# Altium PCB GenRF_R01.PcbDoc
Units mil, origin at the board's own origin, x right, y up, seen from the top; angles counter-clockwise.
Board outline 2755.91 x 1771.65 mil, 2 copper layers (Top Layer, Bottom Layer); 51 components, 36 nets, 161 pads, 297 vias.
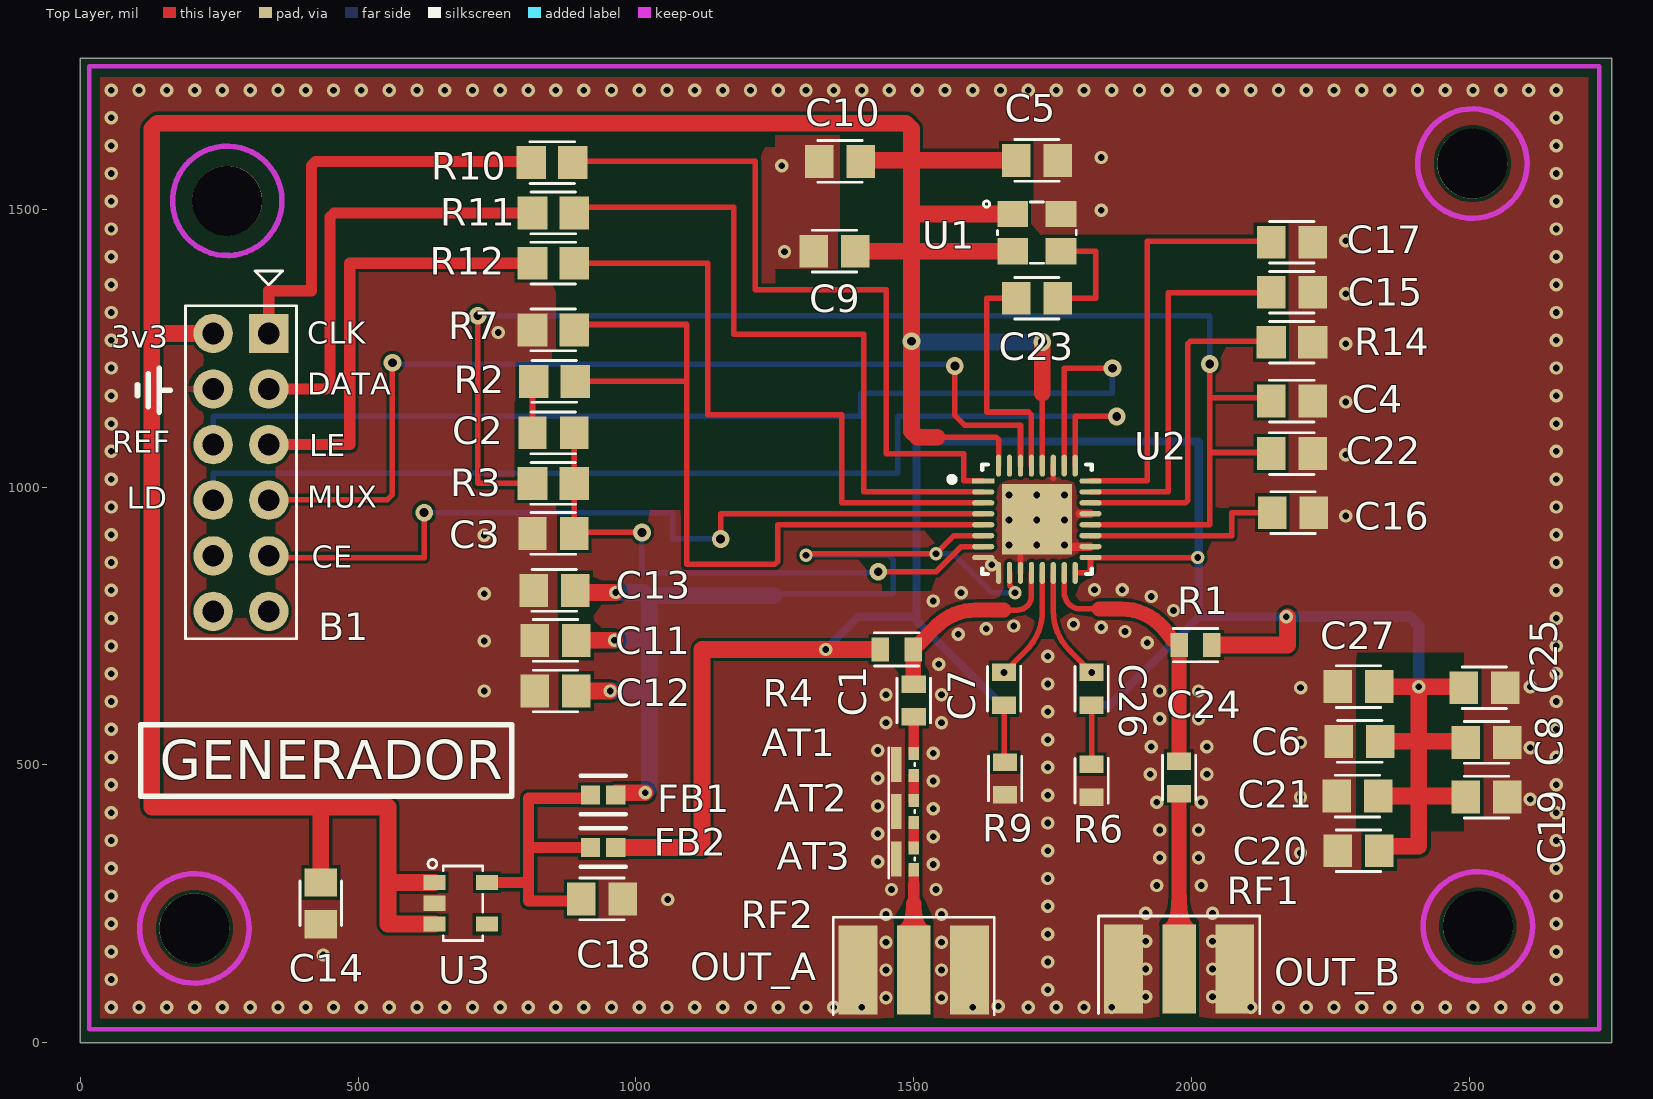
[diagram p0: Top Layer view]
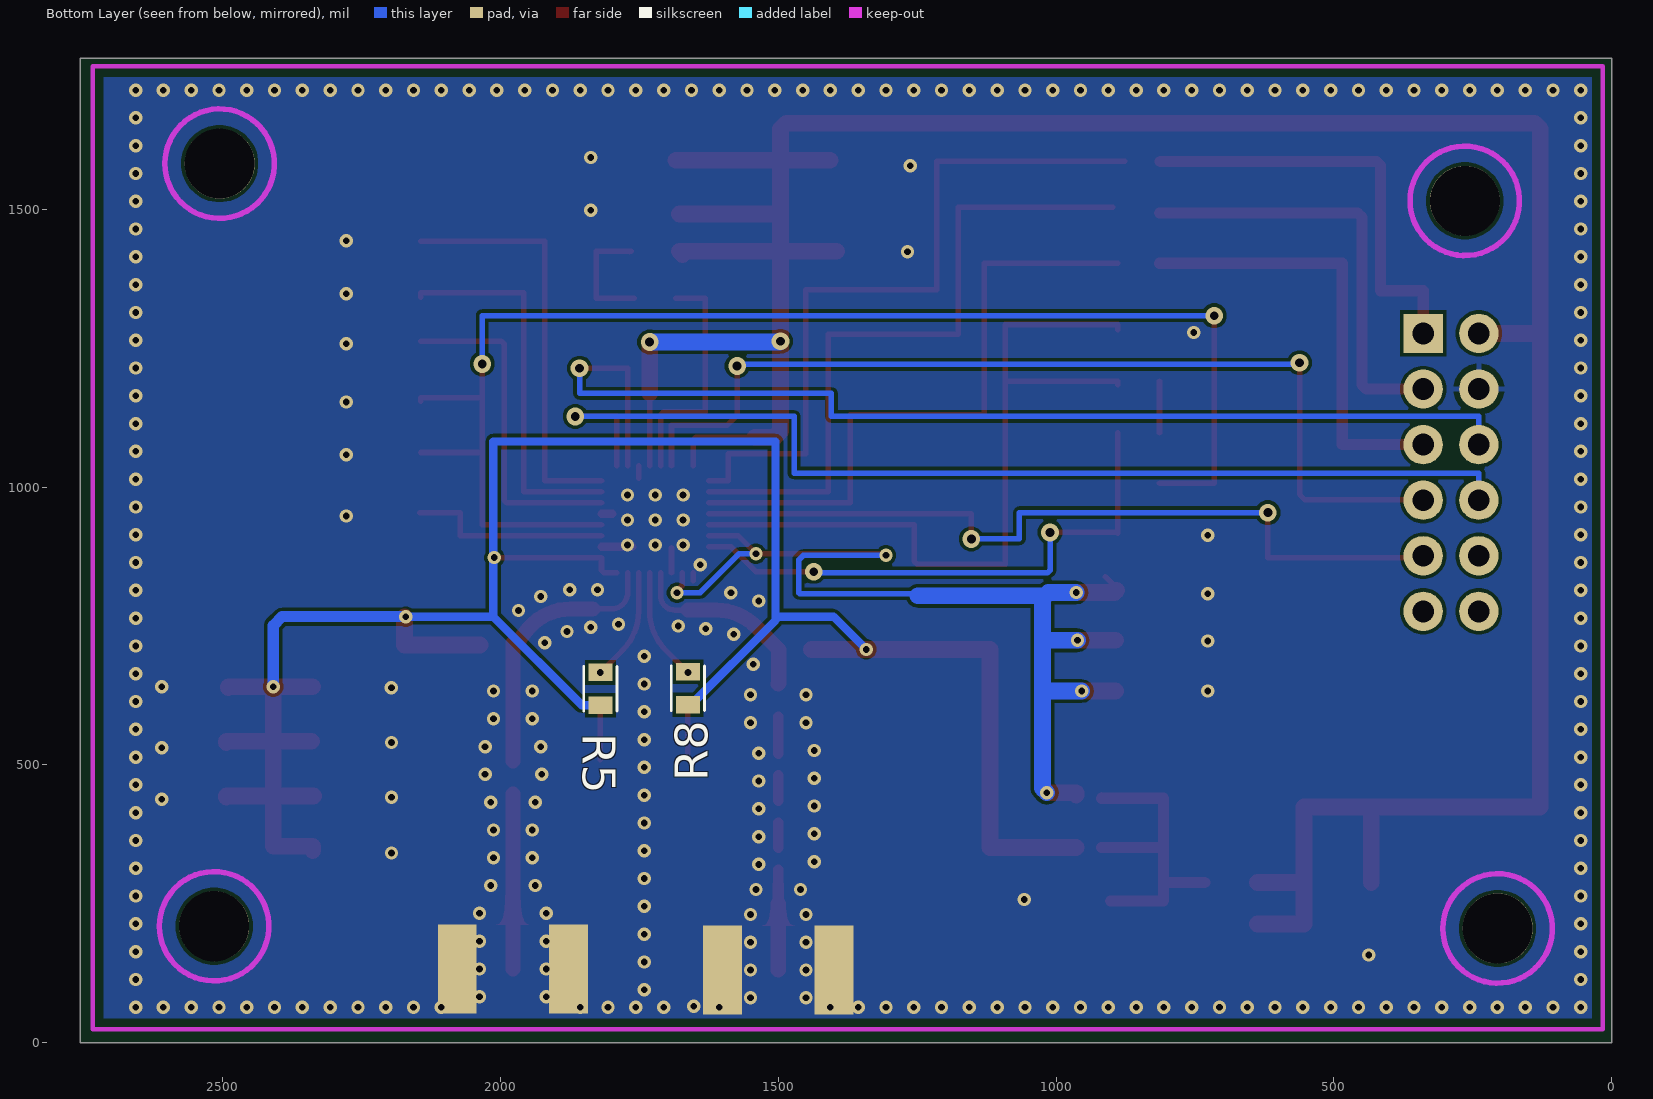
[diagram p1: Bottom Layer view, seen from below]
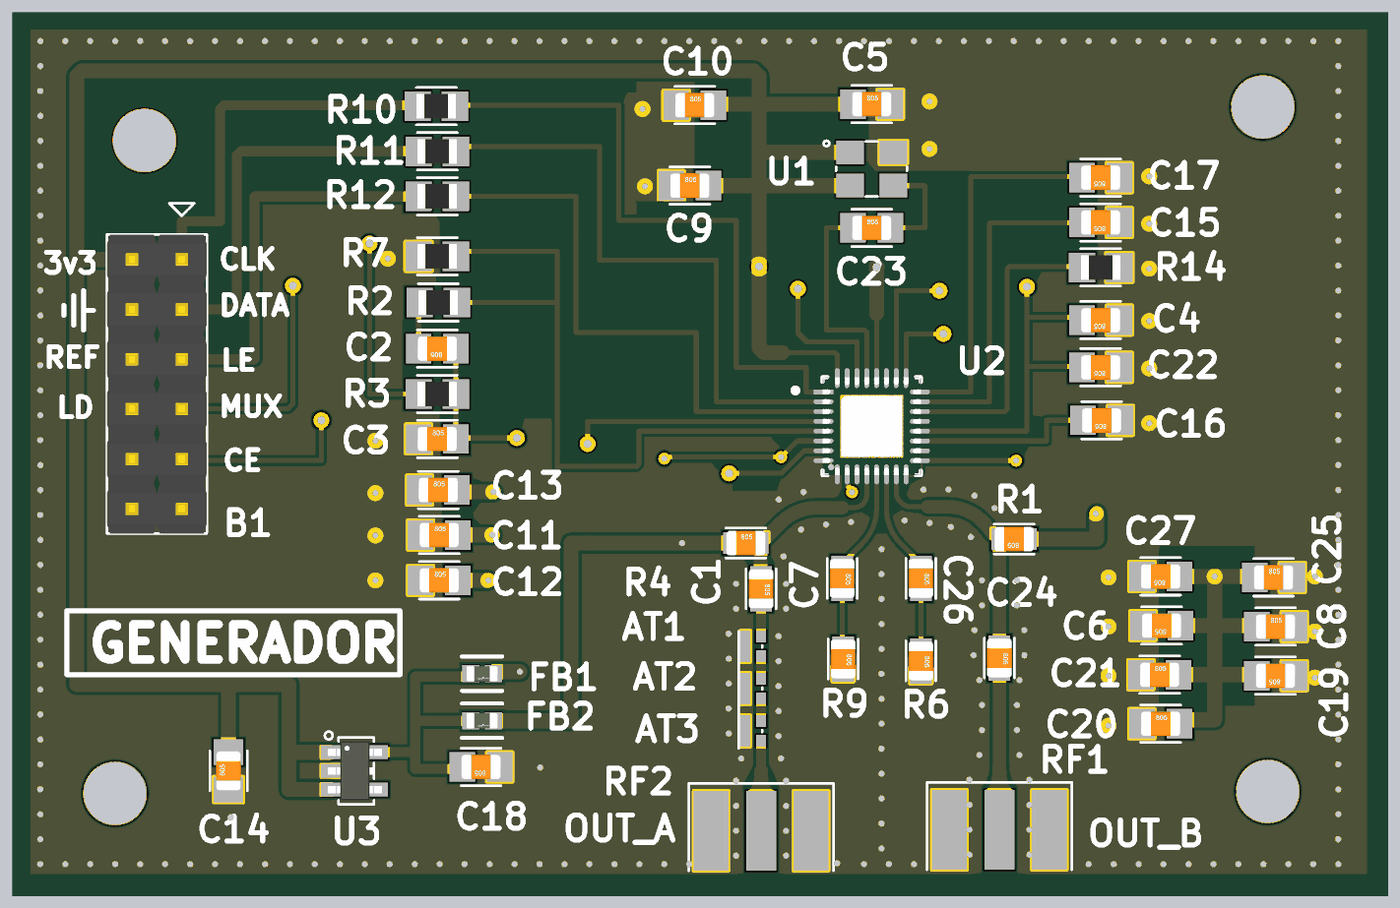
[diagram p2: 3D render of the assembled board from above, using the file's embedded part models]

## Layer stack, top to bottom
Top Solder: solder mask 0.4, Solder Resist, Dk 3.5
Top Layer: signal copper 1.4
Dielectric 1: dielectric 12.6, FR-4, Dk 4.8
Bottom Layer: signal copper 1.4
Bottom Solder: solder mask 0.4, Solder Resist, Dk 3.5

## Board outline
0,0 0,1771.65 2755.91,1771.65 2755.91,0

## Design rules (kind name [scope] priority, off if disabled: settings)
Clearance Clearance_1 [OnMid vs OnMid] p1: gap=6 ignorepadtopadclearanceinfootprint=FALSE sourcerule=39 cellrowname=All cellrowtype=0 cellcolname=All cellcoltype=0 innerlayers=TRUE
Clearance Clearance_2 [(ExistsOnLayer('Top Layer') Or ExistsOnLayer('Bottom Layer')) vs (ExistsOnLayer('Top Layer') Or ExistsOnLayer('Bottom Layer'))] p2: gap=6 ignorepadtopadclearanceinfootprint=FALSE sourcerule=39 cellrowname=All cellrowtype=0 cellcolname=All cellcoltype=0 outerlayers=TRUE
Clearance [All] p3: gap=10 ignorepadtopadclearanceinfootprint=FALSE ismatrix=TRUE
PolygonConnect [All] p1: thpad.connectstyle=Relief thpad.reliefconductorwidth=10 thpad.reliefentries=4 thpad.polygonreliefangle="90 Angle" thpad.airgapwidth=10 smdpad.connectstyle=Direct smdpad.reliefconductorwidth=10 smdpad.reliefentries=4 smdpad.polygonreliefangle="90 Angle" smdpad.airgapwidth=10 via.connectstyle=Direct via.reliefconductorwidth=10 via.reliefentries=4 via.polygonreliefangle="90 Angle" via.airgapwidth=10
RoutingVias RoutingViaStyle_1 [All] p1: holewidth=12 width=24 viastyle="Through Hole" minholewidth=10 minwidth=10 maxholewidth=50 maxwidth=50
RoutingVias [All] p2: holewidth=28 width=50 viastyle="Through Hole" minholewidth=28 minwidth=50 maxholewidth=28 maxwidth=50
SolderMaskExpansion [All] p1: expansion=4 istentingtop=FALSE
SupplyNets "Schematic Supply Nets" [InNet('GND')] p1: voltage=0.000
Width MaxMinWidth_1 [All] p1: maxlimit=100 minlimit=6 preferedwidth=10 minimp=50.000000 maximp=50.000000 favimp=50.000000
Width [All] p2: maxlimit=10 minlimit=10 preferedwidth=10
30 further rules are at their usual default settings.

## Components (designator, comment, footprint, x,y, rotation, side; value= is the part's Value field where it differs from the comment)
AT1 "Atenuador" "Attenuator 0603" 1499.84,520.35 r270 top
AT2 "Atenuador" "Attenuator 0603" 1499.84,435.67 r270 top
AT3 "Atenuador" "Attenuator 0603" 1499.84,350.67 r270 top
B1 "Tira de pines de 12" "Header_M_2x6_0.1\"" 339.49,1276.26 r270 top
C1 "Capacitor" C_0603 1499.84,615.98 r270 top value=100pF
C2 "Capacitor" C_0805 851.3,1097.52 r180 top value=100nF
C3 "Capacitor" C_0805 851.3,916.42 r0 top value=12nF
C4 "Capacitor" C_0805 2180.04,1154.61 r180 top value=680pF
C5 "Capacitor" C_0805 1721.38,1587.68 r0 top value=0.01uF
C6 "Capacitor" C_0805 2302.09,542.4 r180 top value=100pF
C7 "Capacitor" C_0603 1662.32,636.89 r270 top value=100pF
C8 "Capacitor" C_0805 2530.43,540.43 r0 top value=100pF
C9 "Capacitor" C_0805 1357.2,1424.29 r0 top value=100nF
C10 "Capacitor" C_0805 1367.05,1585.71 r0 top value=100nF
C11 "Capacitor" C_0805 855.24,724.05 r0 top value=100nF
C12 "Capacitor" C_0805 855.24,632.95 r0 top value=100nF
C13 "Capacitor" C_0805 853.27,814.06 r0 top value=100pF
C14 "Capacitor" C_0805 433.03,251.06 r90 top value=1uF
C15 "Capacitor" C_0805 2180.04,1350.37 r180 top value=1uF
C16 "Capacitor" C_0805 2182.01,953.82 r180 top value=1uF
C17 "Capacitor" C_0805 2180.04,1440.38 r180 top value=1uF
C18 "Capacitor" C_0805 938.94,258.94 r180 top value=1uF
C19 "Capacitor" C_0805 2530.43,442.01 r180 top value=100nF
C20 "Capacitor" C_0805 2300.12,345.55 r0 top value=100nF
C21 "Capacitor" C_0805 2298.15,443.98 r0 top value=100pF
C22 "Capacitor" C_0805 2180.04,1060.12 r180 top value=150pF
C23 "Capacitor" C_0805 1721.38,1339.65 r0 top value=10nF
C24 "Capacitor" C_0603 1977.28,477.44 r270 top value=100pF
C25 "Capacitor" C_0805 2526.5,638.86 r0 top value=100pF
C26 "Capacitor" C_0603 1819.8,636.89 r270 top value=100pF
C27 "Capacitor" C_0805 2300.12,640.83 r180 top value=100pF
FB1 "BLM18PG181SN1D" FB_0603 940.91,445.94 r0 top
FB2 "BLM18PG181SN1D" FB_0603 940.91,351.46 r0 top
R1 "Resistor" R_0603 2006.81,715.63 r180 top value=49R9
R2 "Resistor" R_0805 853.27,1190.04 r180 top value=30R
R3 "Resistor" R_0805 851.3,1006.43 r0 top value=240R
R4 "Resistor" R_0603 1469.41,707.77 r0 top value=49R9
R5 "Resistor" R_0603 1819.8,636.89 r270 bottom value=49R9
R6 "Resistor" R_0603 1819.8,471.54 r270 top value=49R9
R7 "Resistor" R_0805 851.3,1282.56 r180 top value=90R
R8 "Resistor" R_0603 1662.28,637.95 r90 bottom value=49R9
R9 "Resistor" R_0603 1664.29,475.47 r270 top value=49R9
R10 "Resistor" R_0805 849.33,1583.74 r0 top value=120R
R11 "Resistor" R_0805 851.3,1493.19 r0 top value=120R
R12 "Resistor" R_0805 851.3,1402.64 r0 top value=120R
R14 "Resistor" R_0805 2180.04,1260.36 r180 top value=5K1
RF1 "SMA_Connector" SMA_Connector 1977.28,132.95 r180 top
RF2 "SMA_Connector" SMA_Connector 1499.84,130.98 r180 top
U1 "7X-19.200MBA-T" XTAL 1721.38,1457.76 r0 top
U2 "MAX2871ETJ+" MAX2870ETJ+ 1721.38,941.96 r0 top
U3 "LP5907QMFX-3.3" TSOP 685,251.06 r90 top

## Footprints (in the part's own frame and the unit in brackets; to place one, negate y for a bottom-side part, rotate by r counter-clockwise, add the part's x,y. Pads: shape width x height; smd on the part's side, far side on the other; paste and mask are expansions set on the pad)
"Attenuator 0603" [mm]
  rect 0.6x0.5 smd: 1(0,0) 2(1,0)
  rect 1.6x0.5 smd: 3(0.5,-0.8)
  silkscreen extent 0.45,0.05 0.55,0.05
C_0603 [mm] "Chip Capacitor, 2-Leads,"
  rect 0.8x1.1 smd: 1(-0.75,0) 2(0.75,0)
  silkscreen extent -1.02,-0.76 1.02,0.76, body extent -1,-0.62 1,0.63, height 0.78
C_0805 [mm] "Chip Capacitor, 2-Leads, Body 2.00x1.25mm"
  rect 1.3x1.5 smd: 1(-0.95,0) 2(0.95,0)
  silkscreen extent -1.02,-0.95 1.02,0.95, body extent -1,-0.62 1,0.63, height 0.78
FB_0603 [mm]
  rect 0.88x0.86 smd paste+0 mask+0.05: 1(-0.576,0) 2(0.576,0)
  silkscreen extent -1.03,-0.87 1.03,0.87, body extent -1.13,-0.58 1.13,0.58, height 0.25
"Header_M_2x6_0.1\"" [mm] "Header Male 2 x 6 Vias Pitch 100mils"
  rect 1.8x1.8 hole 1: 1(0,0)
  round 1.8 hole 1: 2(0,-2.54) 3(2.54,0) 4(2.54,-2.54) 5(5.08,0) 6(5.08,-2.54) 7(7.62,0) 8(7.62,-2.54) 9(10.16,0) 10(10.16,-2.54) 11(12.7,0) 12(12.7,-2.54)
  silkscreen extent -2.86,-3.81 13.95,1.27, body extent -1.27,-3.81 13.97,1.27, height 5.59
MAX2870ETJ+ [mm]
  rect 1.01x0.242 smd paste+0 mask+0: 1(-2.451,1.75)
  rrect100% 1.01x0.242 smd paste+0 mask+0: 2(-2.451,1.25) 3(-2.451,0.75) 4(-2.451,0.25) 5(-2.451,-0.25) 6(-2.451,-0.75) 7(-2.451,-1.25) 8(-2.451,-1.75) 17(2.451,-1.75) 18(2.451,-1.25) 19(2.451,-0.75) 20(2.451,-0.25) 21(2.451,0.25) 22(2.451,0.75) 23(2.451,1.25) 24(2.451,1.75)
  rrect100% 0.242x1.01 smd paste+0 mask+0: 9(-1.75,-2.451) 10(-1.25,-2.451) 11(-0.75,-2.451) 12(-0.25,-2.451) 13(0.25,-2.451) 14(0.75,-2.451) 15(1.25,-2.451) 16(1.75,-2.451) 25(1.75,2.451) 26(1.25,2.451) 27(0.75,2.451) 28(0.25,2.451) 29(-0.25,2.451) 30(-0.75,2.451) 31(-1.25,2.451) 32(-1.75,2.451)
  rect 3.2x3.2 smd paste-1000 mask+0: 33(0,0)
  silkscreen extent -4.01,-2.5 2.5,2.5, body extent -3.46,-3.46 3.46,3.46, height 0.25
R_0603 [mm] "Chip Capacitor, 2-Leads,"
  rect 0.8x1.1 smd: 1(-0.75,0) 2(0.75,0)
  silkscreen extent -1.02,-0.76 1.02,0.76, body extent -1,-0.62 1,0.63, height 0.78
R_0805 [mm] "Chip Resistor, 2-Leads, Body 2.00x1.25mm, IPC Low Density"
  rect 1.35x1.5 smd: 1(-0.95,0) 2(0.95,0)
  silkscreen extent -1.02,-0.95 1.02,0.95, body extent -1,-0.62 1,0.62, height 0.6
SMA_Connector [mil] "SMA PCB Connector 1.6mm / PN: EMPCB.CSMAFSTJ.A"
  rect 60x160 smd: 1(0,0)
  rect 70x160 smd: 2(-100,0) 2(100,0)
  rect 70x160 smd far side: 2(-100,0) 2(100,0)
  silkscreen extent -145,-95 145,80, body extent -121,-60 121,80, height 10
TSOP [mm]
  rect 0.7x1 smd mask+0.06: 1(0.95,1.2) 2(0,1.2) 3(-0.95,1.2)
  rect 0.7x1 smd: 4(-0.95,-1.2) 5(0.95,-1.2)
  silkscreen extent -1.7,-1 2,1.5, body extent -1.5,-1.41 1.5,1.34, height 1.1
XTAL [mm] "XTAL OSC XO 19.2000MHZ CMOS SMD"
  rect 1.4x1.2 smd: 1(-1.1,0.85) 2(1.1,0.85) 3(1.1,-0.85) 4(-1.1,-0.85)
  silkscreen extent -2.44,-1.4 1.8,1.44

## Part data
B1: library part "Headpin 10"
FB1 FB2: library part "Ferrite Bead"
RF1 RF2: "Connector SMA"
U1: "XTAL OSC XO 19.2000MHZ CMOS SMD"
U3: "IC REG LINEAR 3.3V 250MA SOT23-5"
C1 C2 C3 C4 C5 C6 C7 C8 C9 C10 C11 C12 C13 C14 C15 C16 C17 C18 C19 C20 C21 C22 C23 C24 C25 C26 C27: SimulationGenericComponent=True
R1 R2 R3 R4 R5 R6 R7 R8 R9 R10 R11 R12 R14: SimulationGenericComponent=True, TC1=0, TC2=0

## Free pads (board coordinates)
  round 125.98 hole 125.98: 2(205.63,205.79) 2(264.68,1514.84) 2(2504.84,1581.77) 2(2514.68,209.72)

## Via types
v1: diameter 24, hole 12, Top Layer to Bottom Layer, tented both sides, 254 vias
v2: diameter 24, hole 12, Top Layer to Bottom Layer, 30 vias
v3: diameter 32, hole 16, Top Layer to Bottom Layer, 11 vias
v4: diameter 32, hole 16, Top Layer to Bottom Layer, tented both sides, 1 vias
v5: diameter 24.02, hole 12, Top Layer to Bottom Layer, 1 vias

## Nets (pads, with @x,y where several pads share a name; then routed paths per layer and width w, separated by ;. In a path a pad name is that pad's centre, name@x,y a point inside that pad or via, vN(x,y) a via of type N, cw(c..) or ccw(c..) an arc to the next point about the centre after c; other vN are vias at no path point)
3V3: B1.2 C5.1 C9.2 C10.2 C14.2 U1.1 U1.4 U2.28 U2.32 U3.1 U3.3 | length 5599.8
  Top Layer w10: U3.1@637.76,286.5 U3.1 ; 1542.24,1089.65 1647.79,1089.65 1652.48,1084.96 U2.32 ; U2.28 1731.22,1168.39
  Top Layer w30: B1.2 128.86,1276.26 ; C14.2 433.03,424.29 ; U3.3 554.06,213.66 554.06,288.46 ; U3.1 554.06,288.46 ; C9.2 1495.8,1424.29 ; C10.2@1406.42,1587.68 1495.8,1587.68 ; 1504.84,1587.68 C5.1 ; 1542.24,1089.65 1506.35,1089.65 1495.8,1100.19 1495.8,1424.29 ; U1.4@1672.17,1418.39 U1.4 1495.8,1424.29 ; U1.1 1495.8,1491.22 ; 1731.22,1168.39 v4(1731.22,1260.91) ; 128.86,1276.26 128.86,424.29 433.03,424.29 ; 128.86,1276.26 128.86,1644.06 139.4,1654.61 1485.26,1654.61 1495.8,1644.06 1495.8,1587.68 ; 433.03,424.29 554.06,424.29 554.06,288.46 ; 1495.8,1424.29 1495.8,1491.22 ; 1495.8,1491.22 1495.8,1587.68
  Bottom Layer w30: v3@1496.97,1260.91 v4(1731.22,1260.91)
  other v3: 1495.8,1262.24
CP_OUT: C2.1 C3.2 R3.2 U2.7 | length 1006.9
  Top Layer w10: C3.2 C3.2@888.7,918.39 ; C2.1 R3.2 C3.2@888.7,918.39 ; v3(1010.75,918.39) C3.2@888.7,918.39 ; v3(1435.94,847.52) 1540.05,847.52 1585.27,892.75 U2.7
  Bottom Layer w10: v3(1010.75,918.39) 1010.75,850.24 1015.43,845.55 1433.98,845.55 v3(1435.94,847.52)
GND: AT1.3 AT2.3 AT3.3 B1.4 C3.1 C4.1 C5.2 C6.2 C8.2 C9.1 C10.1 C11.1 C12.1 C13.1 C14.1 C15.1 C16.1 C17.1 C18.1 C19.1 C20.1 C21.1 C22.1 C25.2 C27.2 R6.2 R7.2 R9.2 R14.1 RF1.2 RF2.2 U1.2 U2.8 U2.9 U2.11 U2.18 U2.21 U2.27 U2.33 U3.2 | length 157.1
  Top Layer w10: U2.9@1652.48,831.15 U2.9 ; U2.11 U2.33@1691.85,890.83 ; 1750.91,1015.95 U2.27
  Top Layer w15: U2.33@1762.72,892.75 U2.18 ; U2.21@1798.17,951.8 U2.21
  other v1: 56.02,64.06 106.02,64.06 156.02,64.06 206.02,64.06 256.02,64.06 306.02,64.06 356.02,64.06 406.02,64.06 456.02,64.06 506.02,64.06 556.02,64.06 606.02,64.06 656.02,64.06 706.02,64.06 756.02,64.06 806.02,64.06 856.02,64.06 906.02,64.06 956.02,64.06 1006.02,64.06 1056.02,64.06 1106.02,64.06 1156.02,64.06 1206.02,64.06 1256.02,64.06 1306.02,64.06 1356.02,64.06 1406.02,64.06 1606.02,64.06 1706.02,64.06 1756.02,64.06 1806.02,64.06 1856.02,64.06 2106.02,64.06 2156.02,64.06 2206.02,64.06 2256.02,64.06 2306.02,64.06 2356.02,64.06 2406.02,64.06 2456.02,64.06 2506.02,64.06 2556.02,64.06 2606.02,64.06 2656.02,64.06 1651.81,65.98 1449.84,80.98 1549.84,80.98 1917.28,82.95 2037.28,82.95 1741.06,95.55 56.02,114.06 2656.02,114.06 1449.84,130.98 1549.84,130.98 1917.28,132.95 2037.28,132.95 1741.06,145.55 437.28,157.95 56.02,164.06 2656.02,164.06 1449.84,180.98 1549.84,180.98 1917.28,182.95 2037.28,182.95 1741.06,195.55 56.02,214.06 2656.02,214.06 1449.84,230.98 1549.84,230.98 1917.28,232.95 2037.28,232.95 1741.06,245.55 1057.28,257.95 56.02,264.06 2656.02,264.06 1459.84,275.98 1539.84,275.98 1937.28,282.95 2017.28,282.95 1741.06,295.55 56.02,314.06 2656.02,314.06 1534.84,320.98 1434.84,325.98 1942.28,332.95 2012.28,332.95 1741.06,345.55 56.02,364.06 2656.02,364.06 1534.84,370.98 1434.84,375.98 1942.28,382.95 2012.28,382.95 1741.06,395.55 56.02,414.06 2656.02,414.06 1534.84,420.98 1434.84,425.98 1937.28,432.95 2017.28,432.95 1741.06,445.55 56.02,464.06 2656.02,464.06 1534.84,470.98 1434.84,475.98 1925.32,482.95 2027.28,482.95 1741.06,495.55 56.02,514.06 2656.02,514.06 1534.84,520.98 1434.84,525.98 1927.28,532.95 2027.28,532.95 1741.06,545.55 56.02,564.06 2656.02,564.06 1449.84,575.98 1549.84,575.98 1942.28,582.95 2012.28,582.95 1741.06,595.55 56.02,614.06 2656.02,614.06 1449.84,625.98 1549.84,625.98 1942.28,632.95 2012.28,632.95 1741.06,645.55 56.02,664.06 2656.02,664.06 1544.84,680.98 1741.06,695.55 56.02,714.06 2656.02,714.06 1920,720 1580,735 1880,740 1630,745 1837.28,747.95 1680,750 1787.28,752.95 56.02,764.06 2656.02,764.06 1967.28,777.95 1535,795 1927.28,802.95 1585,810 56.02,814.06 2656.02,814.06 1825,815 1875,815 1640,860 56.02,864.06 2656.02,864.06 1671.06,895.55 1721.06,895.55 1771.06,895.55 56.02,914.06 2656.02,914.06 1671.06,940.55 1721.06,940.55 1771.06,940.55 56.02,964.06 2656.02,964.06 1671.06,985.55 1721.06,985.55 1771.06,985.55 56.02,1014.06 2656.02,1014.06 56.02,1064.06 2656.02,1064.06 56.02,1114.06 2656.02,1114.06 56.02,1164.06 2656.02,1164.06 56.02,1214.06 2656.02,1214.06 56.02,1264.06 2656.02,1264.06 56.02,1314.06 2656.02,1314.06 56.02,1364.06 2656.02,1364.06 56.02,1414.06 2656.02,1414.06 56.02,1464.06 2656.02,1464.06 56.02,1514.06 2656.02,1514.06 56.02,1564.06 2656.02,1564.06 56.02,1614.06 2656.02,1614.06 56.02,1664.06 2656.02,1664.06 56.02,1714.06 106.02,1714.06 156.02,1714.06 206.02,1714.06 256.02,1714.06 306.02,1714.06 356.02,1714.06 406.02,1714.06 456.02,1714.06 506.02,1714.06 556.02,1714.06 606.02,1714.06 656.02,1714.06 706.02,1714.06 756.02,1714.06 806.02,1714.06 856.02,1714.06 906.02,1714.06 956.02,1714.06 1006.02,1714.06 1056.02,1714.06 1106.02,1714.06 1156.02,1714.06 1206.02,1714.06 1256.02,1714.06 1306.02,1714.06 1356.02,1714.06 1406.02,1714.06 1456.02,1714.06 1506.02,1714.06 1556.02,1714.06 1606.02,1714.06 1656.02,1714.06 1706.02,1714.06 1756.02,1714.06 1806.02,1714.06 1856.02,1714.06 1906.02,1714.06 1956.02,1714.06 2006.02,1714.06 2056.02,1714.06 2106.02,1714.06 2156.02,1714.06 2206.02,1714.06 2256.02,1714.06 2306.02,1714.06 2356.02,1714.06 2406.02,1714.06 2456.02,1714.06 2506.02,1714.06 2556.02,1714.06 2606.02,1714.06 2656.02,1714.06
  other v2: 2195.79,341.61 2609.17,438.07 2195.79,442.01 2609.17,530.59 2195.79,540.43 727.28,632.95 2609.17,640.83 727.28,722.95 727.28,807.95 727.28,912.95 2277.28,947.95 2277.28,1057.95 2277.28,1152.95 2277.28,1257.95 752.28,1277.95 2277.28,1347.95 1267.28,1422.95 2277.28,1442.95 1837.28,1497.95 1262.28,1577.95 1837.28,1592.95
  other v5: 2195.79,638.86
LD: B1.8 U2.25 | length 1940.5
  Top Layer w10: U2.25 1790.28,1127.05 v3(1865.08,1127.05)
  Bottom Layer w10: B1.8 239.49,1024.92 1471.38,1024.92 1471.38,1127.05 v3(1865.08,1127.05) v3@1865.08,1127.83
MUX: B1.7 U2.30 | length 1765.4
  Top Layer w10: B1.7 339.49,977.44 552.72,977.44 561.93,986.65 v3(561.93,1223.5) ; v3(1573.74,1217.6) 1573.74,1129.02 1591.46,1111.3 1691.85,1111.3 U2.30
  Bottom Layer w10: v3(561.93,1223.5) 564.88,1220.55 1570.79,1220.55 v3(1573.74,1217.6)
NetAT1_2: AT1.2 AT2.1 | length 45.3
  Top Layer w19: AT2.1 AT1.2
NetAT2_2: AT2.2 AT3.1 | length 45.6
  Top Layer w19: AT3.1 AT2.2
NetAT3_2: AT3.2 RF2.1 | length 180.3
  Top Layer w19: 1499.84,250.98 AT3.2
  Top Layer w27: RF2.1 1499.84,250.98
NetB1_1: B1.1 R10.1 | length 778
  Top Layer w20: B1.1 339.49,1353.03 416.26,1353.03 416.26,1578.09 423.88,1585.71 R10.1@812.51,1585.71
NetB1_3: B1.3 R11.1 | length 782.4
  Top Layer w20: B1.3 442.11,1176.26 449.72,1183.88 449.72,1485.57 457.34,1493.19 R11.1
NetB1_5: B1.5 R12.1 | length 800.8
  Top Layer w20: B1.5 485.16,1076.26 485.16,1402.64 R12.1
NetB1_9: B1.9 U2.4 | length 1463.7
  Top Layer w10: B1.9 339.49,873.11 619.02,873.11 v3(619.02,953.82) ; v3(1152.48,906.57) 1152.48,951.8 U2.4
  Bottom Layer w10: v3@619.02,955.79 v3(619.02,953.82) 1065.87,953.82 1065.87,906.57 v3(1152.48,906.57)
NetC2_2: C2.2 R2.2 | length 92.5
  Top Layer w10: C2.2 R2.2@813.9,1190.04
NetC7_2: C7.2 R9.1 | length 88.6
  Top Layer w10: R9.1@1662.32,518.78 C7.2
NetC15_2: C15.2 U2.23 | length 686.5
  Top Layer w10: U2.23 1957.6,991.17 1957.6,1349.49 C15.2@2142.64,1349.49 ; C15.2@2142.64,1341.61 C15.2@2142.64,1345.01
NetC16_2: C16.2 U2.19 | length 368.1
  Top Layer w10: U2.19 2071.77,912.43 2071.77,953.82 C16.2
NetC17_2: C17.2 U2.24 | length 756.3
  Top Layer w10: U2.24 1920.2,1010.86 1920.2,1442.35 C17.2@2142.64,1442.35
NetC18_2: C18.2 FB1.1 FB2.1 U3.5 | length 586.5
  Top Layer w10: C18.2@901.54,255 C18.2 ; FB1.1@918.23,440.04 FB1.1
  Top Layer w20: U3.5 807.05,288.46 ; C18.2@901.54,255 807.05,255 807.05,288.46 ; FB2.1 807.05,351.46 ; FB1.1@918.23,440.04 807.05,440.04 807.05,351.46 ; 807.05,288.46 807.05,351.46
NetC23_1: C23.1 U2.29 | length 432
  Top Layer w10: C23.1 1630.83,1339.65 1630.83,1134.92 1706.26,1134.92 1711.54,1129.65 U2.29
NetC24_2: C24.2 RF1.1 | length 315
  Top Layer w27: RF1.1 C24.2
NetC26_2: C26.2 R6.1 | length 98.4
  Top Layer w10: R6.1@1819.8,508.94 C26.2
NetR10_2: R10.2 U2.1 | length 1323.4
  Top Layer w10: R10.2@876.35,1585.71 1215,1585.71 1215,1355 1450,1355 1450,1060 1590,1060 1590,1010.86 U2.1
NetR11_2: R11.2 U2.2 | length 1238.6
  Top Layer w10: R11.2@898.09,1503.03 1176.1,1503.03 1176.1,1275 1410,1275 1410,991.17 U2.2
NetR12_2: R12.2 U2.3 | length 1167.3
  Top Layer w10: R12.2 1128.86,1402.64 1128.86,1130 1370,1130 1370,971.49 U2.3
NetR14_2: R14.2 U2.22 | length 610.1
  Top Layer w10: U2.22 1988.35,971.49 1993.03,976.17 1993.03,1257.65 1997.72,1262.33 R14.2@2142.64,1262.33
REF_EN: B1.6 U2.26 | length 2016.9
  Top Layer w10: U2.26 1770.59,1213.66 v3(1857.2,1213.66)
  Bottom Layer w10: B1.6 239.49,1127.05 1404.45,1127.05 1404.45,1168.39 1857.2,1168.39 v3(1857.2,1213.66)
REF_IN: C23.2 U1.3 | length 219.3
  Top Layer w8: U1.3 U1.3@1766.65,1422.32
  Top Layer w10: C23.2 1827.68,1339.65 1827.68,1424.29 U1.3
RF2: AT1.1 C1.2 | length 66.1
  Top Layer w19: AT1.1 C1.2
RFOUTA_N: C7.1 R8.2 U2.13 | length 203.3
  Top Layer w10: v1(1662.32,666.42) 1701.93,706.03 ccw(c1631.22,776.74) 1731.22,776.74 U2.13
RFOUTA_P: C1.1 R4.2 U2.12 | length 347.6
  Top Layer w10: 1662.32,778.62 1685.94,778.62 ccw(c1685.94,804.21) 1711.54,804.21 U2.12
  Top Layer w27: R4.2 1498.94,647.7 ccw(c1502.03,647.7) C1.1 ; R4.2@1504.84,713.66 1540.51,749.33 cw(c1611.22,678.62) 1611.22,778.62 1662.32,778.62
RFOUTB_N: C24.1 R1.2 U2.15 | length 493.8
  Top Layer w10: U2.15 1770.59,810.21 ccw(c1800.21,810.21) 1800.21,780.59 1833.58,780.59
  Top Layer w20: 1873.55,780.59 1873.68,780.59 ; R1.2@1964.89,725.87 1965.64,725.11 1971.35,719.41 R1.2@1977.28,719.41
  Top Layer w27: 1833.58,780.59 1873.55,780.59 ; 1873.68,780.59 cw(c1873.64,681.99) 1949,745.58 R1.2@1964.89,725.87 ; C24.1 R1.2@1977.28,719.41
RFOUTB_P: C26.1 R5.1 U2.14 | length 203.3
  Top Layer w10: U2.14 1750.91,776.74 ccw(c1850.91,776.74) 1780.19,706.03 v1(1819.8,666.42)
SW: R2.1 R7.1 U2.5 | length 1453.8
  Top Layer w10: R2.1@888.7,1184.13 888.7,1190.04 1091.46,1190.04 ; R7.1 888.7,1292.4 1091.46,1292.4 1091.46,1190.04 ; U2.5 1254.84,932.12 1254.84,865.99 1250.16,861.3 1091.46,861.3 1091.46,1190.04
TUNE: C4.2 C22.2 R3.1 U2.20 | length 2532
  Top Layer w10: v3(715.47,1308.15) 715.47,1006.43 R3.1 ; U2.20 2032.4,932.12 2032.4,1062.09 ; v3(2032.4,1221.54) 2032.4,1160.51 ; C22.2@2142.64,1062.09 2032.4,1062.09 ; C4.2 C4.2@2142.64,1158.54 ; C4.2@2142.64,1160.51 2032.4,1160.51 ; 2032.4,1062.09 2032.4,1160.51
  Bottom Layer w10: v3(715.47,1308.15) 2032.4,1308.15 v3(2032.4,1221.54)
VCC_PLL: C11.2 C12.2 C13.2 FB1.2 U2.6 U2.10 | length 2058.7
  Top Layer w10: C13.2 890.67,817.99 C13.2@911.26,838.58 ; v2(1306.02,877.05) 1306.02,880 v2(1540,880) 1572.43,912.43 U2.6 ; U2.10 1672.39,845.23 1672.39,823.22 1682.01,813.6 v2(1682.01,809.82)
  Top Layer w30: C13.2 894.61,810.12 v2(963.5,810.12) ; C12.2 v2(953.66,632.95) ; C11.2 v2(961.54,724.05) ; FB1.2 963.59,449.88 v1(1016.65,449.88)
  Bottom Layer w10: 1248.94,804.21 1252.87,808.15 1461.54,808.15 1462.94,809.56 1462.94,868.98 1454.88,877.05 v2(1306.02,877.05) ; v2(1540,880) 1570,880 1640.18,809.82 v2(1682.01,809.82)
  Bottom Layer w30: v2(953.66,632.95) 1022.56,632.95 1024.53,630.98 ; v2(961.54,724.05) 1023.99,724.05 1024.53,723.5 ; v2(963.5,810.12) 1013.98,810.12 1019.89,804.21 ; v1(1016.65,449.88) 1024.53,457.76 1024.53,630.98 ; 1248.94,804.21 1019.89,804.21 ; 1019.89,804.21 1024.53,799.57 1024.53,723.5 ; 1024.53,630.98 1024.53,723.5
VCC_RF: C6.1 C8.1 C19.2 C20.2 C21.2 C25.1 C27.1 FB2.2 R1.1 R4.1 R5.2 R8.1 U2.16 U2.17 | length 4423.7
  Top Layer w10: U2.16 1813.2,845.45 1817.88,850.14 U2.17 v2(2010.75,873.06)
  Top Layer w30: FB2.2 1119.02,351.46 1119.02,707.76 v1(1341.46,707.76) R4.1 ; R1.1 2172.17,715.63 v2@2172.17,766.81 ; C21.2 2408.39,443.98 ; C20.2 2337.52,353.43 2408.39,353.43 2408.39,443.98 ; C27.1 v2(2408.39,640.83) ; C6.1 2408.39,542.4 ; C25.1 2489.09,640.83 v2(2408.39,640.83) ; C19.2 2493.03,443.98 2408.39,443.98 ; C8.1 2493.03,542.4 2408.39,542.4 ; 2408.39,443.98 2408.39,542.4 ; 2408.39,542.4 v2(2408.39,640.83)
  Bottom Layer w15: v1(1341.46,707.76) 1400.51,766.81 1504.84,766.81 ; R8.1 1656.38,608.43 1504.84,759.96 1504.84,766.81 ; R5.2 1853.27,607.36 2012.72,766.81 ; v2(2170.2,766.81) 2012.72,766.81 ; 1504.84,766.81 1504.84,1081.77 2012.72,1081.77 2012.72,873.06 2012.72,766.81
  Bottom Layer w20: v2(2170.2,766.81) 2392.64,766.81 2408.39,751.06 v2(2408.39,640.83)
pads on no net: B1.10 B1.11 B1.12 U2.31 U3.4

## Polygon pours and split planes (outlines as drawn)
GND on Bottom Layer "gnd" (solid, pour order 3): 36.34,44.37 36.34,1737.28 2713.5,1737.28 2713.5,44.37
GND on Top Layer "gnd" (solid, remove dead copper, pour order 2): 36.34,1737.28 2713.5,1737.28 2713.5,44.37 36.34,44.37

## Keep-outs
Keep-Out Layer:
  circle w10: c2504.84,1581.77 r98.43
  circle w10: c2514.68,209.72 r98.43
  circle w10: c205.63,205.79 r98.43
  circle w10: c264.68,1514.84 r98.43
  lines w8: 16.65,24.68 2733.19,24.68 2733.19,1756.97 16.65,1756.97 16.65,24.68

## Other copper
Top Layer:
  pour cut-out: 1997.28,266.94 1997.28,257.6 ccw(c2051.93,257.6) 2013.28,218.95 cw(c2006.12,226.12) 2006.12,215.98 1994.84,215.98 1994.84,250.6 cw(c2003.7,250.6) 1997.44,256.87
  pour cut-out: 1941.28,218.95 ccw(c1902.63,257.6) 1957.29,257.6 1957.29,227.14 ccw(c1966,227.14) 1959.84,220.98 cw(c1954.94,225.89) 1954.94,218.95
  pour cut-out: 921.28,1178.82 1080.24,1178.82 1080.14,1178.72 1080.14,957.76 921.28,957.76
  pour cut-out: 921.28,1281.19 921.28,1201.25 1080.24,1201.25 1080.24,1281.19
  pour cut-out: 848.44,1247.03 848.44,1215.63 922.17,1215.63 922.17,1247.03 921.28,1247.03
  pour cut-out: 856.13,1318.09 856.13,1367.2 921.28,1367.2 921.28,1391.42 1117.64,1391.42 1117.64,1285.9 1099.93,1303.62 921.28,1303.62 921.28,1318.09
  pour cut-out: 2298.15,701.85 2489.09,701.85 2489.09,380.98 2296.18,380.98 2296.18,686.1
  pour cut-out: 1798.24,1453.91 1790.37,1453.91 1790.37,1306.18 1920.2,1306.18 1920.2,1453.82
  pour cut-out: 1517.22,1566.27 1715.47,1566.27 1715.47,1510.91 1517.22,1510.91 1517.22,1512.63
  pour cut-out: 781.32,1154.51 781.32,1041.95 876.89,1041.95 876.89,1154.51
  pour cut-out: 1462.84,222.98 1475.32,245.16 1486.93,266.27 1472.22,222.98
  pour cut-out: 1534.23,224.78 1525.6,224.78 1514.08,267.93 1525.6,244.98
  pour cut-out: 1250.31,1611.3 1250.31,1664.45 902.48,1664.45 902.48,1611.3
  pour cut-out: 1367.05,1664.45 1367.05,1436.1 1474.39,1436.1 1474.39,1664.45
  pour cut-out: 1445.79,880.98 1532.4,880.98 1532.4,812.09 1531.77,812.72 1442.55,812.72 1442.55,875.78 1445.79,879.02
  pour cut-out: 1247.28,1392.95 1477.28,1392.95 1477.28,1025.61 1473.75,1022.07 1250.31,1022.07 1250.31,1389.93
  pour cut-out: 1474.39,1101.46 1642.64,1101.46 1642.64,1306.18 1908.98,1306.18 1908.98,1020.75 1800.12,1020.75 1800.12,1067.99 1640.67,1067.99 1640.67,1022.72 1474.39,1022.72

## Silkscreen, mask and mechanical layers (free items; w line width, h text height)
Top Overlay:
  lines w5: 1454.84,295.98 1454.84,380.98 ; 1454.84,435.98 1454.84,380.98 ; 1454.84,530.98 1454.84,380.98
  lines w10: 103.27,1164.45 103.27,1184.13 ; 122.95,1144.76 122.95,1203.82 ; 142.64,1134.92 142.64,1213.66 ; 142.64,1174.29 162.32,1174.29 ; 109.17,443.98 776.5,443.98 776.5,571.93 109.17,571.93 109.17,443.98
  text "CLK" at 408.54,1258.16 h40
  text "3v3" at 56.18,1250.29 h40
  text "DATA" at 408.54,1165.64 h40
  text "REF" at 58.15,1061.31 h40
  text "LE" at 412.48,1055.41 h40
  text "MUX" at 408.54,962.89 h40
  text "LD" at 83.74,960.92 h40
  text "CE" at 416.42,854.62 h40
  text "GENERADOR" at 142.95,474.08 h70
  text "OUT_A" at 1097.52,112.34 h50
  text "OUT_B" at 2148.7,102.5 h50
Mechanical 1:
  the board outline again, w5

## Dimensions
-3.03,5 to 2752.87,5 on Mechanical 10
2752.87,1776.65 to 2752.87,5 on Mechanical 10